# EAGLE board Sensor Board Layout (EAGLE 6.5.0)
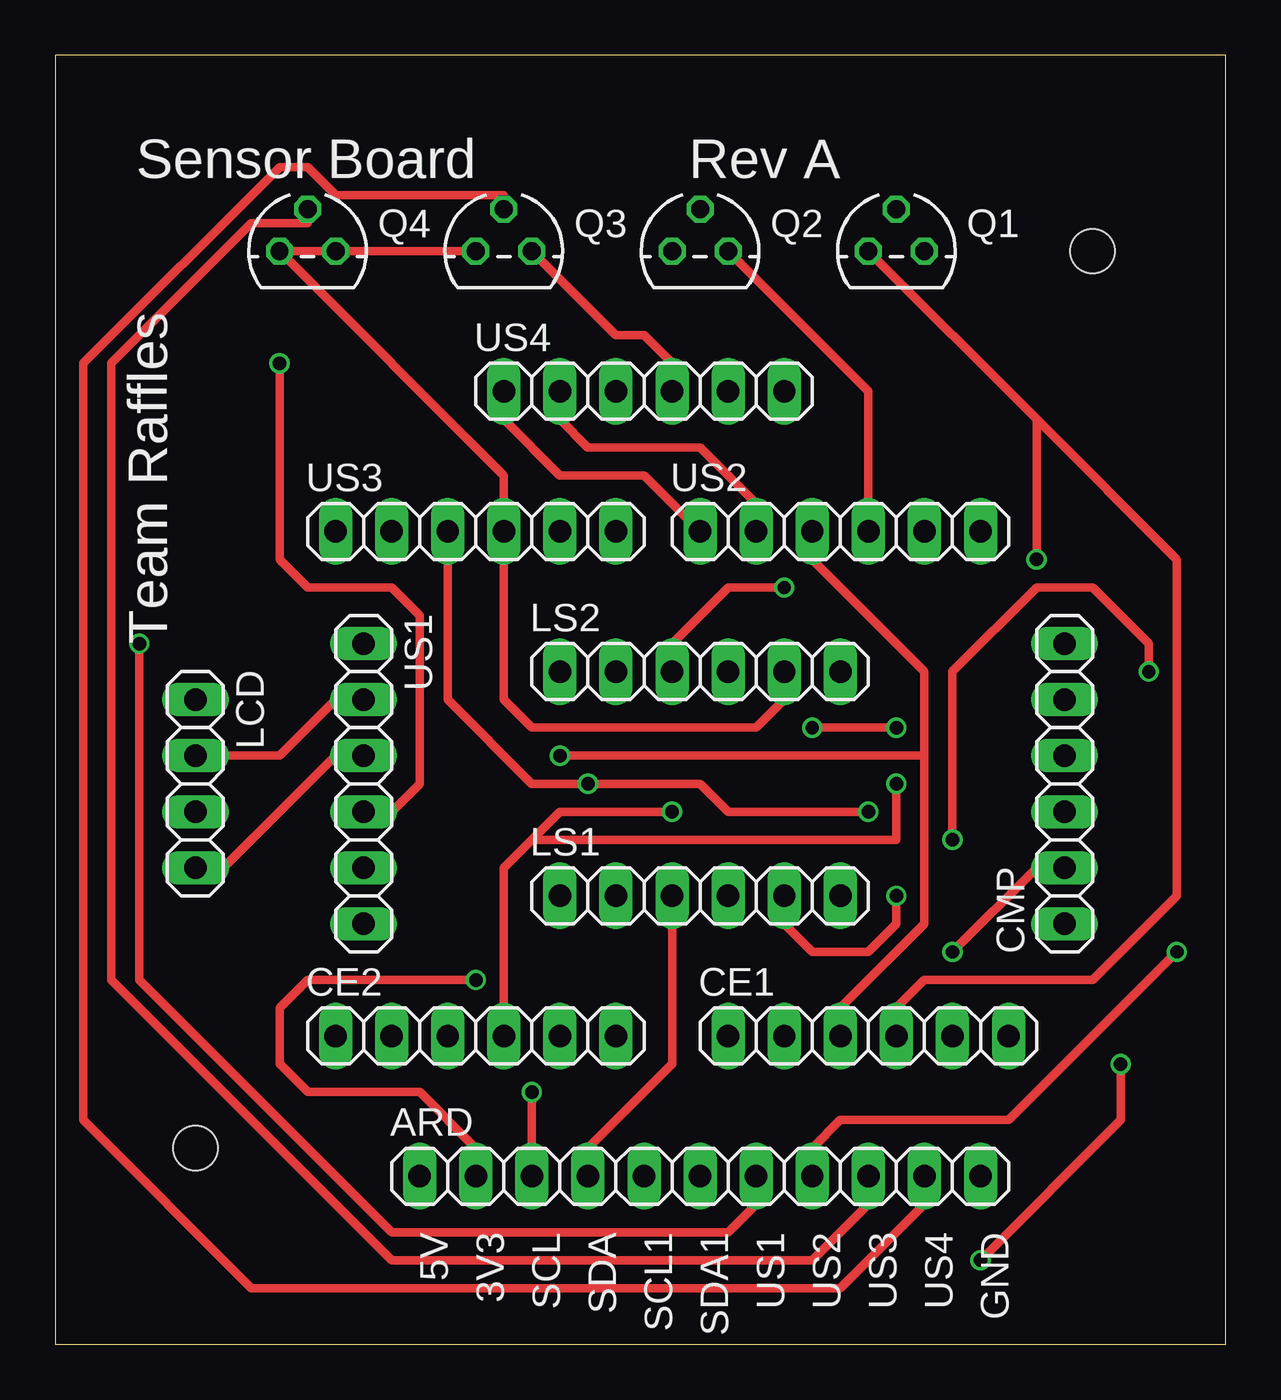
[diagram p0: board, top side]
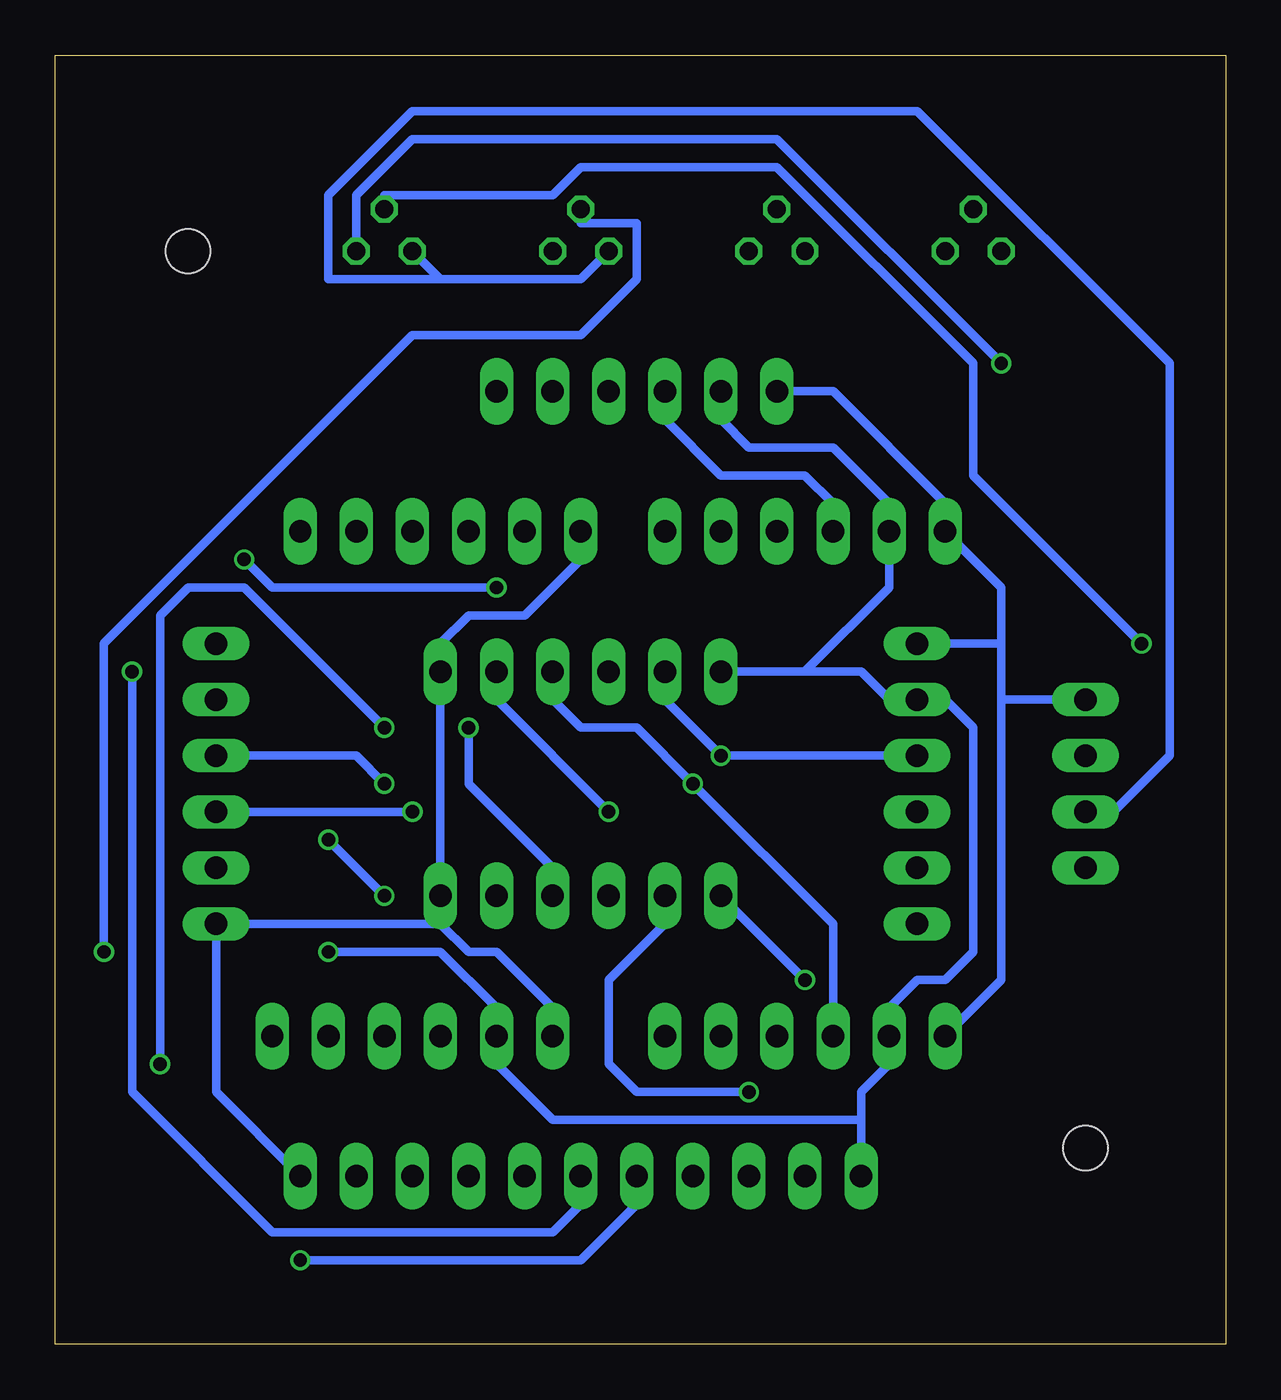
[diagram p1: board, bottom side, seen from below]

Size 53.01 x 58.41 mm. Coordinates in mm from the lower left corner, seen from the top.
Outline: 0,0 53.01,0 53.01,58.41 0,58.41 0,0
Copper layers (1*2*15*16): Top 0.035mm / dielectric 0.2mm / layer 2 0.0175mm / dielectric 1.1mm / layer 15 0.0175mm / dielectric 0.2mm / Bottom 0.035mm
Design rules "SeeedStudio_DRU_no_angle_20130527": minimum track width 6mil, minimum drill 12mil, track to track 6mil, track to pad 6mil, pad to pad 6mil, via to via 6mil, smd to smd 0mil, copper to edge 10mil, drill to drill 10mil, minimum pad ring 6mil, minimum via ring 6mil, stop-mask expansion 2mil, vias tented up to drill 25mil, thermal gap 10mil
Net classes: 0 default: width 0.381 mm, drill 0.508 mm, clearance 0.381 mm
Holes 2 mm at 6.35,8.89 46.99,49.53

## Footprints (pad centres in the part's own frame; a part is rotated, then mirrored left to right if it is on the bottom)
1X11 = drill 1.016 long: 1 -12.7,0; 2 -10.16,0; 3 -7.62,0; 4 -5.08,0; 5 -2.54,0; 6 0,0; 7 2.54,0; 8 5.08,0; 9 7.62,0; 10 10.16,0; 11 12.7,0
1X06 = drill 1.016 long: 1 -6.35,0; 2 -3.81,0; 3 -1.27,0; 4 1.27,0; 5 3.81,0; 6 6.35,0
1X04 = drill 1.016 long: 1 -3.81,0; 2 -1.27,0; 3 1.27,0; 4 3.81,0
TO-92 = drill 0.813 octagon: 1 -1.27,0; 2 0,1.905; 3 1.27,0

## Placement (x,y rotation side)
ARD  [1X11]  29.21,7.62 0 top
CE1  [1X06]  36.83,13.97 0 top
CE2  [1X06]  19.05,13.97 0 top
CMP  [1X06]  45.72,25.4 90 top
LCD  [1X04]  6.35,25.4 270 top
LS1  [1X06]  29.21,20.32 0 top
LS2  [1X06]  29.21,30.48 0 top
Q1  [TO-92]  38.1,49.53 0 top
Q2  [TO-92]  29.21,49.53 0 top
Q3  [TO-92]  20.32,49.53 0 top
Q4  [TO-92]  11.43,49.53 0 top
US1  [1X06]  13.97,25.4 270 top
US2  [1X06]  35.56,36.83 0 top
US3  [1X06]  19.05,36.83 0 top
US4  [1X06]  26.67,43.18 0 top

## Library data of the parts
ARD CE1 CE2 CMP LCD LS1 LS2 US1-US4 = pinhead
Q1-Q4 = transistors

## Nets
+3V3: ARD.2 LS1.1
+5V: ARD.1 CE1.2 CE2.2 CMP.2 LCD.2 LS2.1 US1.2 US2.2 US3.2 US4.2
GND: ARD.11 CE1.1 CE2.1 CMP.1 LCD.1 LS1.6 LS2.6 US1.1 US2.1 US3.1 US4.1
N$1: Q1.3 US1.4
N$2: Q2.3 US2.4
N$3: Q3.3 US4.4
SCL1H: CE2.3 CMP.3 LS2.4 US3.3 US4.3
SCL1L: ARD.5 LS1.4
SCLH: CE1.3 LCD.4 LS2.2 US1.3 US2.3
SCLL: ARD.3 LS1.2
SDA1H: CE2.4 CMP.4 LS2.5 Q3.1 Q4.1 Q4.3 US3.4
SDA1L: ARD.6 LS1.5
SDAH: CE1.4 LCD.3 LS2.3 Q1.1 Q2.1
SDAL: ARD.4 LS1.3
US1E: ARD.7 Q1.2
US2E: ARD.8 Q2.2
US3E: ARD.9 Q4.2
US4E: ARD.10 Q3.2

## Tracks (layer width: path | path; a pad name or v marks a point on that pad's centre or on a via)
+3V3  (via drill 0.61)
  Top 0.381: ARD.2 19.05,8.89 16.51,11.43 11.43,11.43 10.16,12.7 10.16,15.24 11.43,16.51 v19.05,16.51
  Bottom 0.381: LS1.1 v19.05,16.51
+5V  (via drill 0.61)
  Top 0.381: LCD.2 10.16,26.67 12.7,29.21 US1.2 | US2.2 31.75,38.1 29.21,40.64 24.13,40.64 22.86,41.91 US4.2 | CMP.2 44.45,21.59 v40.64,17.78
  Bottom 0.381: 19.05,30.48 16.51,30.48 15.24,29.21 US1.2 12.7,29.21 11.43,27.94 11.43,17.78 12.7,16.51 13.97,16.51 15.24,15.24 CE2.2 15.24,12.7 16.51,11.43 16.51,10.16 | 19.05,30.48 LS2.1 | 19.05,30.48 15.24,34.29 US3.2 15.24,38.1 17.78,40.64 21.59,40.64 22.86,41.91 US4.2 | 16.51,10.16 ARD.1 | 16.51,10.16 30.48,10.16 33.02,12.7 CE1.2 33.02,15.24 35.56,17.78 v40.64,17.78
GND
  Top 0.381: US2.1 26.67,39.37 22.86,39.37 20.32,41.91 US4.1
  Bottom 0.381: ARD.11 45.72,11.43 CMP.1 35.56,19.05 | CE1.1 30.48,15.24 33.02,17.78 34.29,17.78 35.56,19.05 | 35.56,19.05 LS1.6 LS2.6 35.56,31.75 34.29,33.02 31.75,33.02 29.21,35.56 US2.1 | CE2.1 10.16,16.51 10.16,29.21 | 10.16,31.75 10.16,34.29 US3.1 12.7,38.1 17.78,43.18 US4.1 | 10.16,31.75 10.16,29.21 | 10.16,29.21 LCD.1 | 10.16,31.75 US1.1
N$1  (via drill 0.61)
  Top 0.381: v10.16,44.45 10.16,35.56 11.43,34.29 15.24,34.29 16.51,33.02 16.51,25.4 15.24,24.13 US1.4
  Bottom 0.381: Q1.3 39.37,52.07 36.83,54.61 20.32,54.61 v10.16,44.45
N$2
  Top 0.381: Q2.3 36.83,43.18 US2.4
N$3
  Top 0.381: Q3.3 25.4,45.72 26.67,45.72 27.94,44.45 US4.4
SCL1H  (via drill 0.61)
  Top 0.381: v36.83,24.13 30.48,24.13 29.21,25.4 v24.13,25.4 21.59,25.4 17.78,29.21 US3.3
  Bottom 0.381: CE2.3 17.78,19.05 v24.13,25.4 26.67,27.94 29.21,27.94 30.48,29.21 LS2.4 | v36.83,24.13 CMP.3 | US4.3 25.4,41.91 22.86,39.37 19.05,39.37 17.78,38.1 US3.3
SCL1L  (via drill 0.61)
  Top 0.381: v41.91,3.81 48.26,10.16 v48.26,12.7 | v34.29,27.94 v38.1,27.94
  Bottom 0.381: ARD.5 26.67,6.35 29.21,3.81 v41.91,3.81 | v48.26,12.7 48.26,33.02 46.99,34.29 44.45,34.29 v38.1,27.94 | v34.29,27.94 34.29,25.4 30.48,21.59 LS1.4
SCLH  (via drill 0.61)
  Top 0.381: CE1.3 35.56,15.24 39.37,19.05 39.37,26.67 | 39.37,26.67 39.37,30.48 34.29,35.56 US2.3 | LCD.4 7.62,21.59 12.7,26.67 US1.3 | v22.86,26.67 39.37,26.67
  Bottom 0.381: LS2.2 25.4,29.21 v22.86,26.67 US1.3
SCLL  (via drill 0.61)
  Top 0.381: v21.59,11.43 ARD.3
  Bottom 0.381: v21.59,11.43 26.67,11.43 27.94,12.7 27.94,16.51 25.4,19.05 LS1.2
SDA1H  (via drill 0.61)
  Top 0.381: Q3.1 Q4.3 Q4.1 20.32,39.37 US3.4 20.32,29.21 21.59,27.94 31.75,27.94 33.02,29.21 LS2.5 | CE2.4 20.32,21.59 21.59,22.86 | 21.59,22.86 22.86,24.13 v27.94,24.13 | v38.1,25.4 38.1,22.86 21.59,22.86
  Bottom 0.381: v27.94,24.13 33.02,29.21 LS2.5 | CMP.4 39.37,26.67 v38.1,25.4
SDA1L  (via drill 0.61)
  Top 0.381: v49.53,30.48 49.53,31.75 46.99,34.29 44.45,34.29 40.64,30.48 v40.64,22.86 | v38.1,20.32 38.1,19.05 36.83,17.78 34.29,17.78 33.02,19.05 LS1.5
  Bottom 0.381: ARD.6 29.21,6.35 30.48,5.08 43.18,5.08 49.53,11.43 v49.53,30.48 | v38.1,20.32 v40.64,22.86
SDAH  (via drill 0.61)
  Top 0.381: CE1.4 38.1,15.24 39.37,16.51 46.99,16.51 50.8,20.32 50.8,35.56 44.45,41.91 | Q1.1 44.45,41.91 | LS2.3 27.94,31.75 30.48,34.29 v33.02,34.29 | 44.45,41.91 v44.45,35.56
  Bottom 0.381: Q2.1 29.21,48.26 35.56,48.26 | Q1.1 35.56,48.26 | LCD.3 5.08,24.13 2.54,26.67 2.54,44.45 13.97,55.88 36.83,55.88 40.64,52.07 40.64,48.26 35.56,48.26 | v33.02,34.29 43.18,34.29 v44.45,35.56
SDAL
  Top 0.381: ARD.4 24.13,8.89 27.94,12.7 LS1.3
US1E  (via drill 0.61)
  Top 0.381: v3.81,31.75 3.81,16.51 15.24,5.08 30.48,5.08 31.75,6.35 ARD.7
  Bottom 0.381: v3.81,31.75 11.43,39.37 11.43,44.45 20.32,53.34 29.21,53.34 30.48,52.07 38.1,52.07 Q1.2
US2E  (via drill 0.61)
  Top 0.381: v50.8,17.78 43.18,10.16 35.56,10.16 34.29,8.89 ARD.8
  Bottom 0.381: v50.8,17.78 50.8,31.75 36.83,45.72 29.21,45.72 26.67,48.26 26.67,50.8 29.21,50.8 Q2.2
US3E
  Top 0.381: ARD.9 36.83,6.35 34.29,3.81 15.24,3.81 2.54,16.51 2.54,44.45 8.89,50.8 11.43,50.8 Q4.2
US4E
  Top 0.381: ARD.10 39.37,6.35 35.56,2.54 8.89,2.54 1.27,10.16 1.27,44.45 10.16,53.34 11.43,53.34 12.7,52.07 20.32,52.07 Q3.2

## Text on the board
tPlace: Sensor Board | Rev A | Team Raffles | 5V | 3V3 | SCL | SDA | SCL1 | SDA1 | US1 | US2 | US3 | US4 | GND